# Altium PCB PCB_RX.PcbDoc (part 1 of 2)
Units mm, origin at the board's own origin, x right, y up, seen from the top; angles counter-clockwise.
Board outline 85 x 54.6 mm, 2 copper layers (Top Layer, Bottom Layer); 126 components, 66 nets, 378 pads, 157 vias.
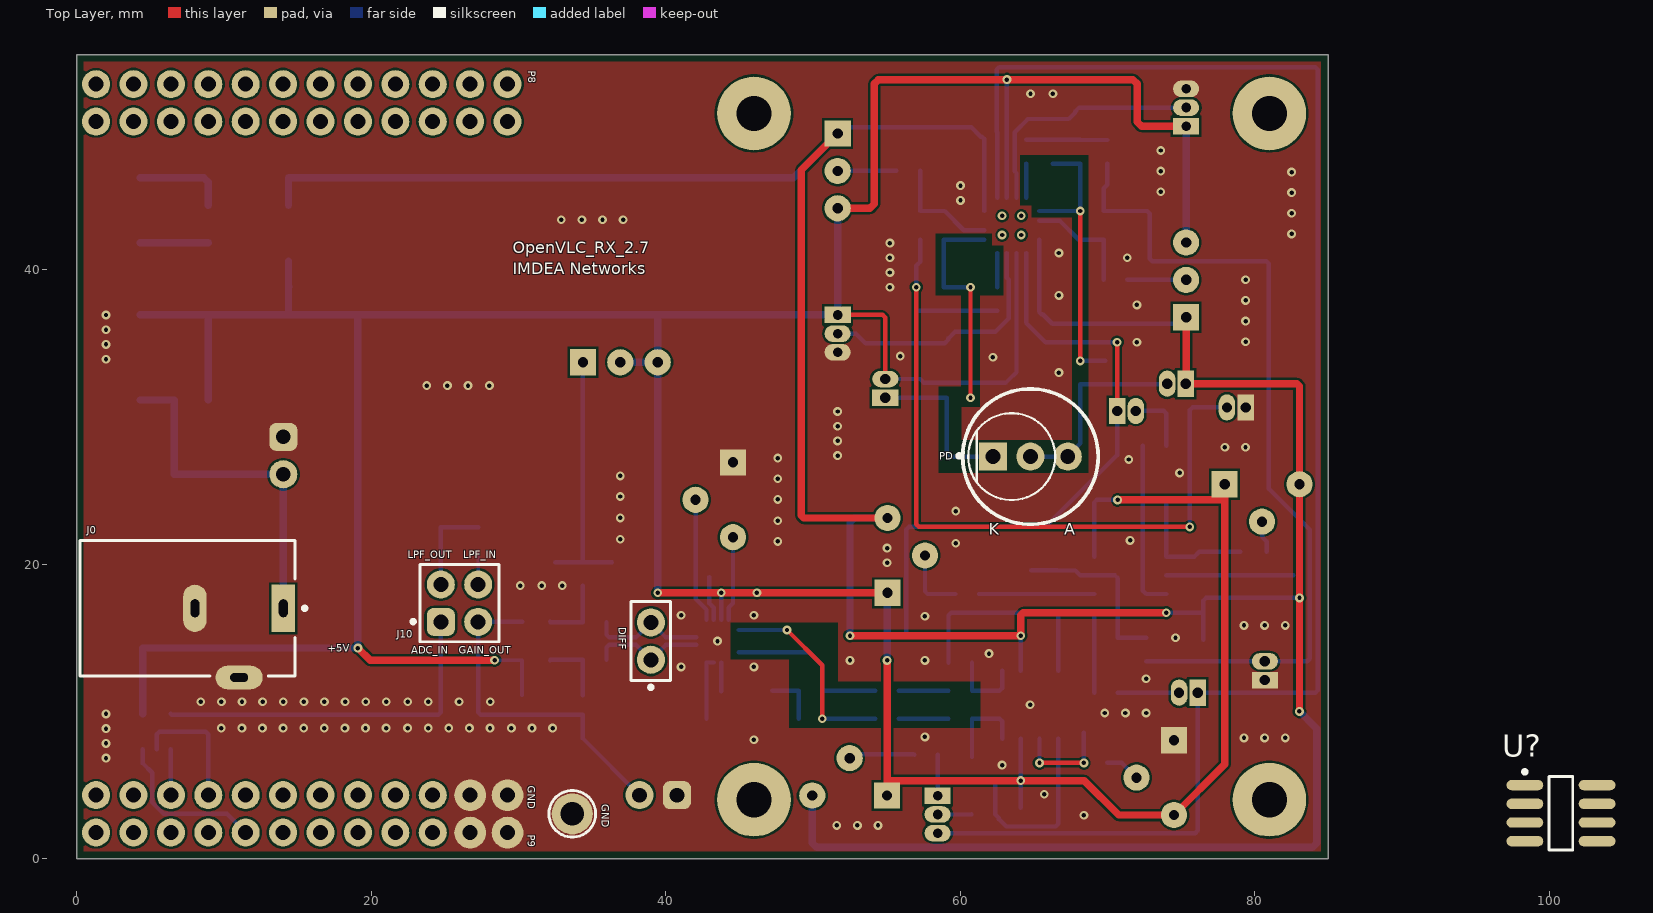
[diagram p0: Top Layer view]
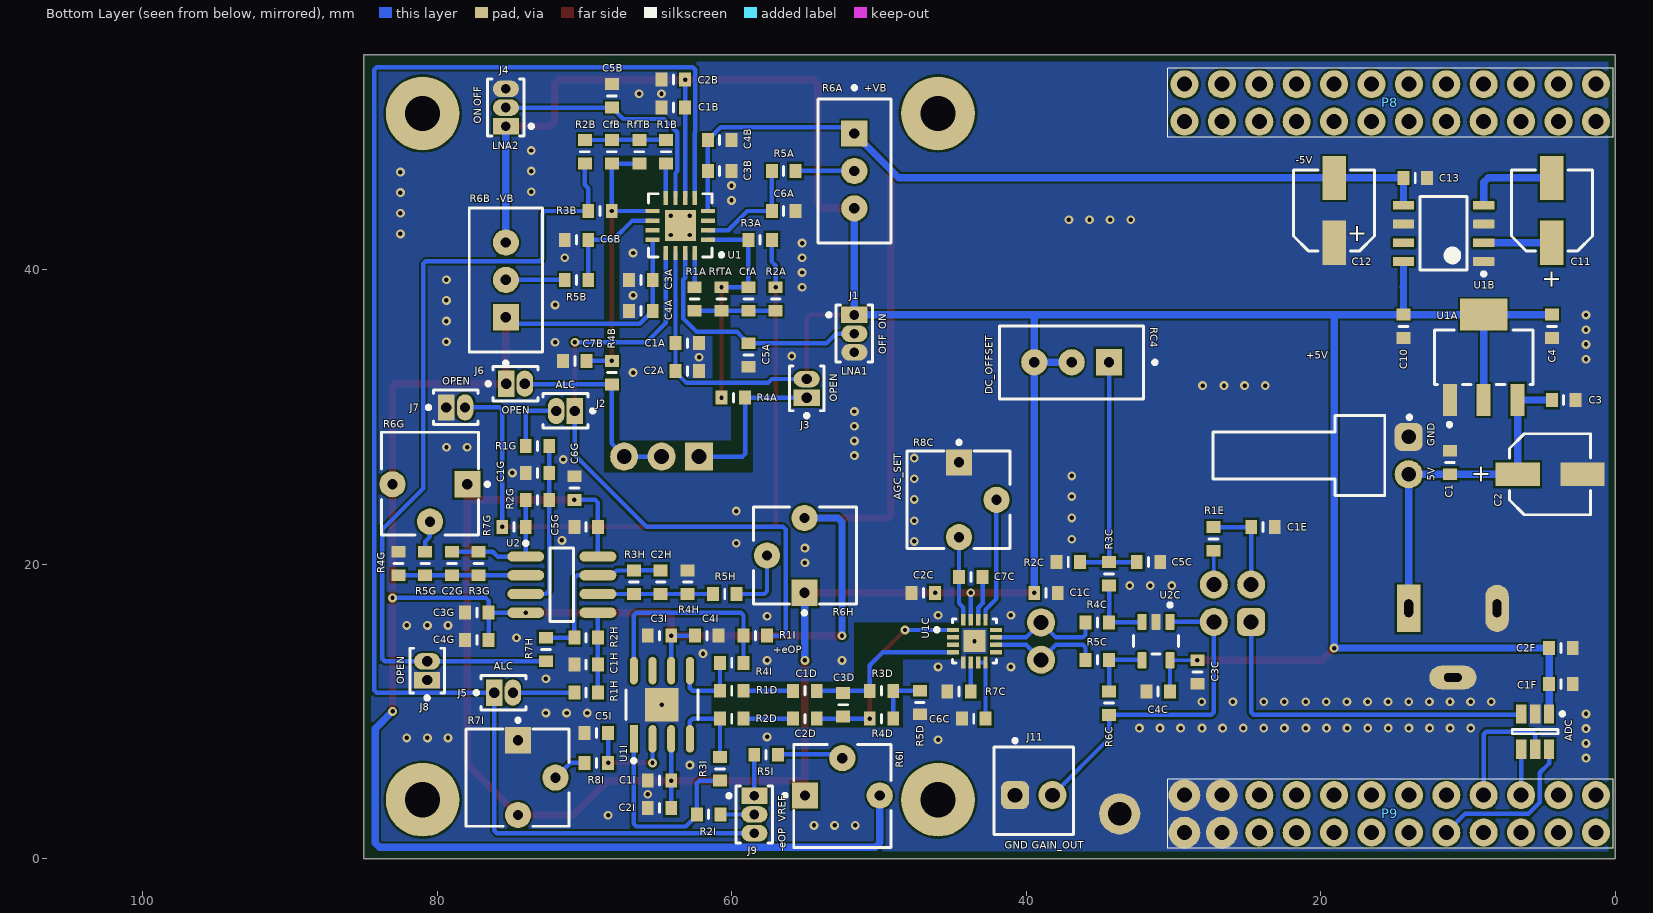
[diagram p1: Bottom Layer view, seen from below]
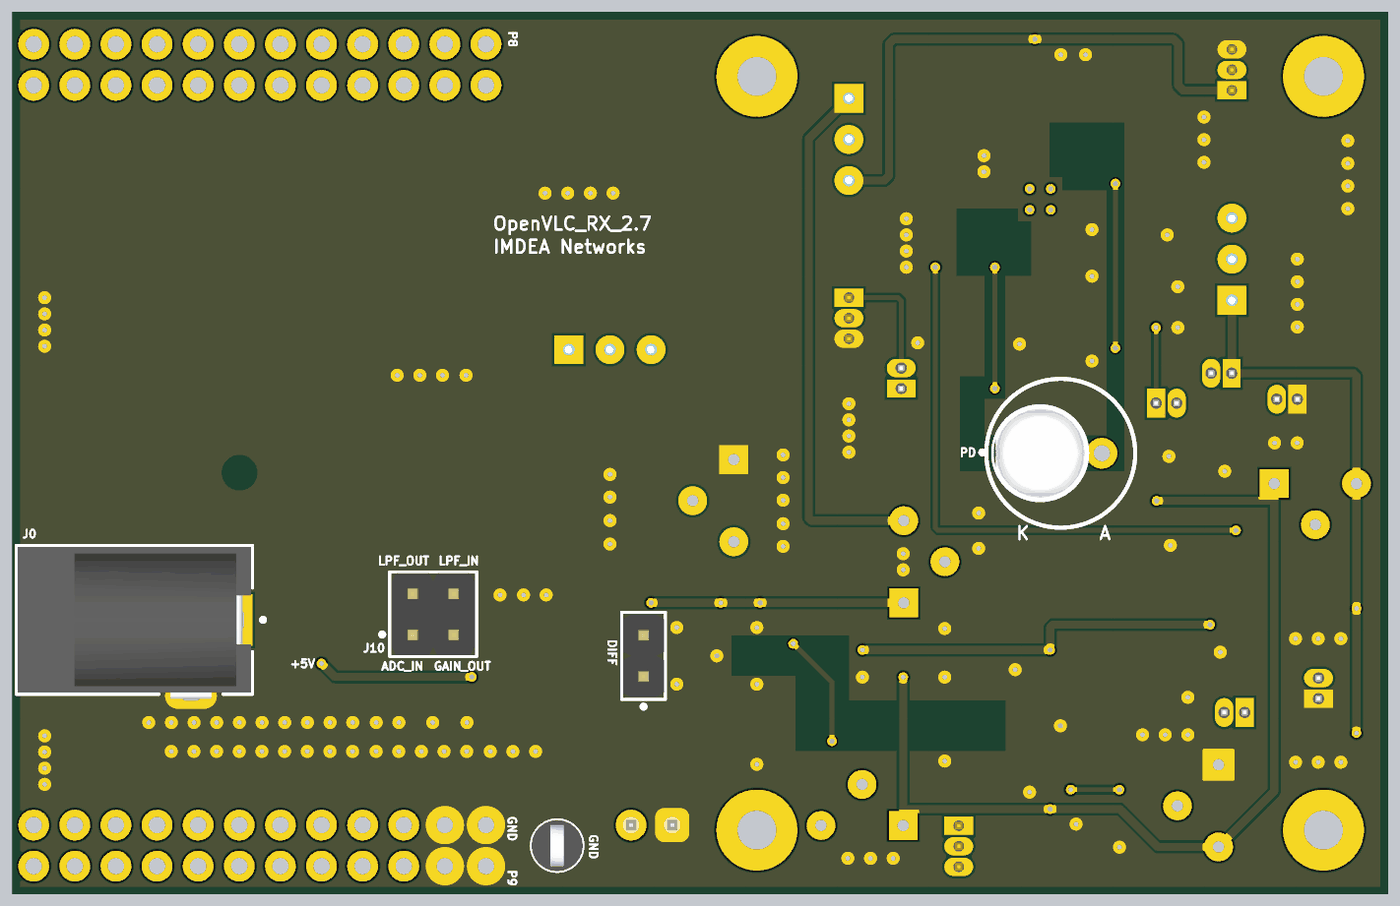
[diagram p2: 3D render of the assembled board from above, using the file's embedded part models]

## Layer stack, top to bottom
Top Solder: solder mask 0.0102, Solder Resist, Dk 3.5
Top Layer: signal copper 0.0356
Dielectric1: dielectric 0.32, FR-4, Dk 4.8
Bottom Layer: signal copper 0.0356
Bottom Solder: solder mask 0.0102, Solder Resist, Dk 3.5

## Board outline
0,0 85,0 85,54.6 0,54.6

## Design rules (kind name [scope] priority, off if disabled: settings)
Clearance Clearance_1 [(InNet('GND') AND InComponent('DC-DC'))] p1: gap=0.5 ignorepadtopadclearanceinfootprint=FALSE except(0: Arc-Hole Track-Hole SMDPad-Hole THPad-Hole Via-Hole Fill-Hole Poly-Hole Region-Hole Text-Hole)
Clearance [All] p2: gap=0.15 ignorepadtopadclearanceinfootprint=FALSE except(0: Arc-Hole Track-Hole SMDPad-Hole THPad-Hole Via-Hole Fill-Hole Poly-Hole Region-Hole Text-Hole)
DiffPairsRouting [All] p1: maxlimit=0.5 minlimit=0.2 mostfreqgap=0.2 toplayer_minwidth=0.127 toplayer_maxwidth=0.3 toplayer_prefwidth=0.127 bottomlayer_minwidth=0.127 bottomlayer_maxwidth=0.3 bottomlayer_prefwidth=0.127 impedanceprofiledriven=TRUE impedanceprofileid={C9FF6727-0311-42C7-A47E-204A0AB31086} impedanceprofilevalue=130.000000 maxuncoupledlength=12.7
HoleSize [All] p1: absolutevalues=TRUE maxlimit=2.54 minlimit=0.25 maxpercent=80.000 minpercent=20.000
MinimumSolderMaskSliver [All] p1: minsoldermaskwidth=0.15
PlaneConnect [All] p1: planeconnectstyle=Direct reliefexpansion=0.508 reliefentries=4 reliefconductorwidth=0.254 reliefairgap=0.254
PolygonConnect PolygonConnect_1 [IsVia & InNet('GND')] p1: connectstyle=Direct reliefconductorwidth=0.254 reliefentries=4 polygonreliefangle="90 Angle" airgapwidth=0
PolygonConnect [All] p2: connectstyle=Direct reliefconductorwidth=0.254 reliefentries=4 polygonreliefangle="90 Angle" airgapwidth=0.254
RoutingVias [All] p1: holewidth=0.711 width=1.27 viastyle="Through Hole" minholewidth=25 minwidth=0.55 maxholewidth=0.711 maxwidth=1.27
SMDNeckDown [All] p1: percent=80.000
SilkToSilkClearance [All] p1: silktosilkclearance=0.15
SilkToSolderMaskClearance [IsPad] p1: minsilkscreentomaskgap=0.15 clearancetoexposedcopper=TRUE
SolderMaskExpansion [All] p1: expansion=0.102 istentingtop=FALSE
SupplyNets "Schematic Supply Nets_5" [InNet('+5V')] p1: voltage=0.000
SupplyNets "Schematic Supply Nets_2" [InNet('-5V')] p2: voltage=0.000
SupplyNets "Schematic Supply Nets_1" [InNet('VCC')] p3: voltage=0.000
SupplyNets "Schematic Supply Nets" [InNet('GND')] p4: voltage=0.000
Width [All] p1: maxlimit=1 minlimit=0.15 preferedwidth=0.3 minimp=50.000000 maximp=50.000000 favimp=50.000000
24 further rules are at their usual default settings.

## Classes and differential pairs
differential pair LNA: +LNA_P -LNA_N
differential pair BPF: +BPF_P -BPF_N
differential pair AGC: +AGC_P -AGC_N

## Components (designator, comment, footprint, x,y, rotation, side; value= is the part's Value field where it differs from the comment)
5V "61900211021" 61900211021 -1248.51,-1242.629 r270 bottom
ADC "ADS7886SBDBVR" TI-DBV6_M 5.455,8.629 r270 bottom
C1 "Cap" RESC1608X55N 11.245,26.901 r90 bottom value=10uF
C1A "Cap" RESC1608X55N 63.025,35 r180 bottom value=100nF
C1B "Cap" RESC1608X55N 63.975,51 r0 bottom value=100nF
C1C "Cap" RESC1608X55N 38.663,18.05 r180 bottom value=100nF
C1D "Cap" RESC1608X55N 55.037,11.4 r180 bottom value=120nF
C1E "Cap" RESC1608X55N 23.933,22.511 r180 bottom value=620pF
C1F "Cap" RESC1608X55N 3.705,11.847 r180 bottom value=100nF
C1G "Cap" RESC1608X55N 73.201,26.19 r180 bottom value=100nF
C1H "Cap" RESC1608X55N 69.893,13.17 r180 bottom value=100nF
C1I "Cap" RESC1608X55N 64.915,5.3 r0 bottom value=100nF
C2 "47uF" WCAP-PSLP_D5H5.5 4.438,26.101 r0 bottom
C2A "Cap" RESC1608X55N 63.025,33.1 r180 bottom value=2.2uF
C2B "Cap" RESC1608X55N 63.975,52.9 r0 bottom value=2.2uF
C2C "Cap" RESC1608X55N 47,18.05 r0 bottom value=2.2uF
C2D "Cap" RESC1608X55N 55.037,9.5 r180 bottom value=120nF
C2F "Cap" RESC1608X55N 3.705,14.3 r180 bottom value=2.2uF
C2G "Cap" RESC1608X55N 79.011,20.042 r90 bottom value=100nF
C2H "Cap" RESC1608X55N 64.83,18.772 r90 bottom value=100nF
C2I "Cap" RESC1608X55N 64.915,3.45 r0 bottom value=2.2uF
C3 "Cap" RESC1608X55N 3.515,31.145 r0 bottom value=2.2uF
C3A "Cap" RESC1608X55N 66.175,39.3 r0 bottom value=100nF
C3B "Cap" RESC1608X55N 60.825,46.7 r180 bottom value=100nF
C3C "Cap" RESC1608X55N 28.384,12.674 r270 bottom value=100nF
C3D "Cap" RESC1608X55N 52.437,10.45 r90 bottom value=330pF
C3G "Cap" RESC1608X55N 77.317,16.702 r0 bottom value=100nF
C3I "Cap" RESC1608X55N 64.915,15.137 r180 bottom value=100nF
C4 "Cap" RESC1608X55N 4.315,36.145 r90 bottom value=10uF
C4A "Cap" RESC1608X55N 66.175,37.2 r0 bottom value=2.2uF
C4B "Cap" RESC1608X55N 60.825,48.8 r180 bottom value=2.2uF
C4C "Cap" RESC1608X55N 31.05,11.359 r0 bottom value=2.2uF
C4G "Cap" RESC1608X55N 77.317,14.856 r0 bottom value=2.2uF
C4I "Cap" RESC1608X55N 61.7,15.137 r0 bottom value=2.2uF
C5A "Cap" RESC1608X55N 58.877,34.2 r270 bottom value=100nF
C5B "Cap" RESC1608X55N 68.149,51.8 r90 bottom value=100nF
C5C "Cap" RESC1608X55N 31.708,20.138 r0 bottom value=2.2uF
C5G "Cap" RESC1608X55N 69.893,22.531 r0 bottom value=100nF
C5I "Cap" RESC1608X55N 69.2,8.541 r0 bottom value=100nF
C6A "Cap" RESC1608X55N 56.477,43.975 r180 bottom value=100nF
C6B "Cap" RESC1608X55N 70.549,42.024 r0 bottom value=100nF
C6C "Cap" RESC1608X55N 43.573,9.5 r180 bottom value=2.2uF
C6G "Cap" RESC1608X55N 70.693,25.161 r90 bottom value=2.2uF
C7B "Cap" RESC1608X55N 70.66,33.8 r0 bottom value=100nF
C7C "Cap" RESC1608X55N 43.773,19.124 r0 bottom value=2.2uF
C10 "Cap" RESC1608X55N 14.395,36.145 r90 bottom value=2.2uF
C11 "47uF" WCAP-PSLP_D5H5.5 4.315,44.023 r270 bottom
C12 "47uF" WCAP-PSLP_D5H5.5 19.105,44.023 r270 bottom
C13 "Cap" RESC1608X55N 13.595,46.223 r0 bottom value=10uF
CfA "Cap" RESC1608X55N 58.877,38 r270 bottom value=0.3pF
CfB "Cap" RESC1608X55N 68.149,48 r90 bottom value=0.3pF
DIFF "61300211121" 61300211121 39,14.774 r90 top
GND "5011" KSTN-5011_V 33.662,3.041 r270 top
J0 "PJ-102A" FP-PJ-102A-MFG 7.54,17 r90 top
J1 "GRPB031VWVN-RC" FP-TMS-103-02-G-S-MFG 51.682,35.651 r270 bottom
J2 "GRPB021VWVN-RC" FP-GRPB021VWVN-RC-MFG 71.295,30.4 r0 bottom
J3 "GRPB021VWVN-RC" FP-GRPB021VWVN-RC-MFG 54.915,31.933 r90 bottom
J4 "GRPB031VWVN-RC" FP-TMS-103-02-G-S-MFG 75.344,51 r90 bottom
J5 "GRPB021VWVN-RC" FP-GRPB021VWVN-RC-MFG 75.5,11.27 r180 bottom
J6 "GRPB021VWVN-RC" FP-GRPB021VWVN-RC-MFG 74.693,32.249 r180 bottom
J7 "GRPB021VWVN-RC" FP-GRPB021VWVN-RC-MFG 78.75,30.64 r180 bottom
J8 "GRPB021VWVN-RC" FP-GRPB021VWVN-RC-MFG 80.692,12.765 r90 bottom
J9 "GRPB031VWVN-RC" FP-TMS-103-02-G-S-MFG 58.469,3 r270 bottom
J10 "61300421121" 61300421121 26.003,17.344 r0 top
J11 "61900211121" 61900211121 39.5,4.611 r0 bottom
P8 "61302421121" BBB_CAPE_NO_HEADER_R_24#1 57.205,50.049 r0 bottom
P9 "61302421121" BBB_CAPE_NO_HEADER_R_24#2 57.205,1.771 r0 bottom
PD "SFH213" FP-SFH213-0 63.5,27.3 r0 top
R1A "Res1" RESC1608X55N 62.525,38 r90 bottom value=100
R1B "Res1" RESC1608X55N 64.475,48 r270 bottom value=100
R1D "Res1" RESC1608X55N 60.005,11.4 r0 bottom value=130
R1E "Res1" RESC1608X55N 27.294,21.711 r270 bottom value=130
R1G "Res1" RESC1608X55N 73.201,28.028 r180 bottom value=10k
R1H "Res1" RESC1608X55N 69.893,11.27 r180 bottom value=10k
R1I "Res1" RESC1608X55N 58.405,15.137 r180 bottom value=510
R2A "Res1" RESC1608X55N 57.021,38 r90 bottom value=100
R2B "Res1" RESC1608X55N 69.984,48 r270 bottom value=100
R2C "Res1" RESC1608X55N 37.156,20.138 r0 bottom value=130
R2D "Res1" RESC1608X55N 60.005,9.5 r0 bottom value=130
R2G "Res1" RESC1608X55N 73.201,24.361 r180 bottom value=10k
R2H "Res1" RESC1608X55N 69.893,15 r180 bottom value=10k
R2I "Res1" RESC1608X55N 61.57,3.012 r180 bottom value=510
R3A "Res1" RESC1608X55N 58.077,42.024 r180 bottom value=100
R3B "Res1" RESC1608X55N 68.949,43.975 r0 bottom value=100
R3C "Res1" RESC1608X55N 34.383,19.338 r90 bottom value=130
R3D "500" RESC1608X55N 49.837,11.4 r180 bottom value=130
R3G "Res1" RESC1608X55N 77.194,20.042 r90 bottom value=10k
R3H "Res1" RESC1608X55N 66.655,18.772 r90 bottom value=10k
R3I "Res1" RESC1608X55N 60.803,6.1 r270 bottom value=1k
R4A "Res1" RESC1608X55N 59.9,31.3 r0 bottom value=0
R4B "Res1" RESC1608X55N 68.149,33 r270 bottom value=0
R4C "Res1" RESC1608X55N 35.183,16.044 r0 bottom value=130
R4D "Res1" RESC1608X55N 49.837,9.5 r0 bottom value=130
R4G "Res1" RESC1608X55N 82.637,20.042 r270 bottom value=10k
R4H "Res1" RESC1608X55N 62.996,18.772 r270 bottom value=10k
R4I "Res1" RESC1608X55N 60.005,13.3 r180 bottom value=1k
R5A "Res1" RESC1608X55N 56.477,46.7 r0 bottom value=100
R5B "Res1" RESC1608X55N 70.549,39.3 r180 bottom value=100
R5C "Res1" RESC1608X55N 35.183,13.504 r0 bottom value=130
R5D "Res1" RESC1608X55N 47.237,10.6 r90 bottom value=1M
R5G "Res1" RESC1608X55N 80.82,20.042 r90 bottom value=100
R5H "Res1" RESC1608X55N 60.481,17.972 r180 bottom value=100
R5I "Res1" RESC1608X55N 57.674,7.054 r180 bottom value=100
R6A "50k" FP-3296W-MFG 51.677,46.7 r90 bottom value=500kΩ
R6B "50k" FP-3296W-MFG 75.349,39.3 r270 bottom value=500kΩ
R6C "Res1" RESC1608X55N 34.383,10.559 r90 bottom value=130
R6G "50k" BOUR-3362P#1 80.5,25.458 r0 bottom
R6H "50k" BOUR-3362P#1 55.037,20.59 r90 bottom
R6I "50k" BOUR-3362P#1 52.497,4.25 r180 bottom
R7C "Res1" RESC1608X55N 44.573,11.359 r180 bottom value=10k
R7G "Res1" RESC1608X55N 74.793,22.531 r180 bottom value=0
R7H "Res1" RESC1608X55N 72.623,14.2 r90 bottom value=0
R7I "50k" BOUR-3362P#1 74.554,5.5 r270 bottom
R8C "10k" BOUR-3362P#2 44.609,24.367 r270 bottom
R8I "Res1" RESC1608X55N 69.2,6.5 r0 bottom value=100
RC4 "500" FP-3296W-MFG 36.923,33.7 r180 bottom value=500kΩ
RfTA "Res1" RESC1608X55N 60.7,38 r270 bottom value=20k
RfTB "Res1" RESC1608X55N 66.282,48 r90 bottom value=20k
U1 "ADA4817-2ACPZ-RL" CP-16-4_N 63.5,43 r0 bottom
U1A "TLV76150DCYR" FP-DCY0004A-MFG 8.945,34.045 r90 bottom
U1B "LM2663M/NOPB" D0008A_N 11.67,42.458 r0 bottom
U1C "AD8338ACPZ-R7" FP-CP-16-22-IPC_A 43.523,14.774 r180 bottom
U1I "AD8139ARDZ-REEL" FP-RD-8-1-IPC_C 64.75,10.45 r90 bottom
U2 "AD8066ARZ-R7" ADI-R-8_M 71.543,18.607 r180 bottom
U2C "OPA863ADBVR" FP-DBV0005A-MFG 31.2,14.774 r270 bottom
U? "AD8066ARZ-R7" ADI-R-8_M 100.796,3.089 r0 top

## Footprints (in the part's own frame and the unit in brackets; to place one, negate y for a bottom-side part, rotate by r counter-clockwise, add the part's x,y. Pads: shape width x height; smd on the part's side, far side on the other; paste and mask are expansions set on the pad)
61300211121 [mil] "Pin Header, pitch 2.54 mm, THT, Vertical, single row, 2p"
  round 75 hole 40: 1(-50,0) 2(50,0)
  silkscreen extent -129,-53 106,53, body extent -100,-50 100,50, height 337
61300421121 [mil] "Pin Header, pitch 2.54 mm, THT, Vertical, dual row, 4p"
  rrect50% 75x75 hole 40: 1(-50,-50)
  round 75 hole 40: 2(-50,50) 3(50,-50) 4(50,50)
  silkscreen extent -129,-103 106,103, body extent -100,-100 100,100, height 338
61900211021 [mm] "2.54mm Male Left Angled Header Bottom Locking, 2p"
  rrect50% 1.905x1.905 hole 1: 1(-1271.27,-1262.55)
  round 1.905 hole 1: 2(-1268.73,-1262.55)
  silkscreen extent -1272.72,-1275.82 -1267.29,-1262.38, body extent -1272.54,-1275.75 -1267.46,-1262.23, height 5.83
61900211121 [mm] "2.54mm Male Locking Header, 2p"
  rrect50% 1.905x1.905 hole 1: 1(1.27,0.3)
  round 1.905 hole 1: 2(-1.27,0.3)
  silkscreen extent -2.71,-3.52 2.71,2.98, body extent -2.54,-2.9 2.54,2.9, height 11.53
ADI-R-8_M [mm] "SOIC, 8-Leads, Body 4.9x3.9mm, Pitch 1.27mm, IPC Low Density"
  oval 2.5x0.7 smd: 1(-2.45,1.905) 2(-2.45,0.635) 3(-2.45,-0.635) 4(-2.45,-1.905) 5(2.45,-1.905) 6(2.45,-0.635) 7(2.45,0.635) 8(2.45,1.905)
  silkscreen extent -2.58,-2.5 0.8,2.93, body extent -2,-2.5 2,2.5, height 1.75
BBB_CAPE_NO_HEADER_R_24#1 [mil] "46-pin male header for BeagleBone Black P8,P9"
  round 75 hole 40: 23(-1100,0) 24(-1100,-100) 25(-1200,0) 26(-1200,-100) 27(-1300,0) 28(-1300,-100) 29(-1400,0) 30(-1400,-100) 31(-1500,0) 32(-1500,-100) 33(-1600,0) 34(-1600,-100) 35(-1700,0) 36(-1700,-100) 37(-1800,0) 38(-1800,-100) 39(-1900,0) 40(-1900,-100) 41(-2000,0) 42(-2000,-100) 43(-2100,0) 44(-2100,-100) 45(-2200,0) 46(-2200,-100)
  silkscreen extent -2246,-142 -1056,42
BBB_CAPE_NO_HEADER_R_24#2 [mil] "46-pin male header for BeagleBone Black P8,P9"
  round 85 hole 40: 23(-1100,0) 24(-1100,-100) 25(-1200,0) 26(-1200,-100)
  round 75 hole 40: 27(-1300,0) 28(-1300,-100) 29(-1400,0) 30(-1400,-100) 31(-1500,0) 32(-1500,-100) 33(-1600,0) 34(-1600,-100) 35(-1700,0) 36(-1700,-100) 37(-1800,0) 38(-1800,-100) 39(-1900,0) 40(-1900,-100) 41(-2000,0) 42(-2000,-100) 43(-2100,0) 44(-2100,-100) 45(-2200,0) 46(-2200,-100)
  silkscreen extent -2246,-142 -1056,42
BOUR-3362P#1 [mm] "THD, 3-Leads, Body 6.6x6.99mm, Pitch 2.54mm"
  rect 1.778x1.778 hole 0.7: 1(-2.54,0.035)
  round 1.778 hole 0.7: 2(0,2.575) 3(2.54,0.035)
  silkscreen extent -4.02,-3.49 3.3,3.5, body extent -3.3,-3.49 3.3,3.49, height 4.95
BOUR-3362P#2 [mm] "THD, 3-Leads, Body 6.6x6.99mm, Pitch 2.54mm"
  rect 1.778x1.778 hole 0.7 paste-2539.97 mask+0: 1(-2.54,0.035)
  round 1.778 hole 0.7 paste-2539.97 mask+0: 2(0,2.575) 3(2.54,0.035)
  silkscreen extent -4.02,-3.49 3.3,3.5, body extent -3.3,-3.49 3.3,3.49, height 4.95
CP-16-4_N [mm] "QFN, 16-Leads, Body 4x4mm, Pitch 0.65mm, Thermal Pad 2.1x2.1mm, IPC Medium Density"
  rect 0.95x0.3 smd: 1(-1.875,0.975) 2(-1.875,0.325) 3(-1.875,-0.325) 4(-1.875,-0.975) 9(1.875,-0.975) 10(1.875,-0.325) 11(1.875,0.325) 12(1.875,0.975)
  rect 0.3x0.95 smd: 5(-0.975,-1.875) 6(-0.325,-1.875) 7(0.325,-1.875) 8(0.975,-1.875) 13(0.975,1.875) 14(0.325,1.875) 15(-0.325,1.875) 16(-0.975,1.875)
  rect 2.1x2.1 smd: 17(0,0)
  silkscreen extent -2.92,-2.15 2.15,2.15, body extent -2,-2 2,2, height 1
D0008A_N [mm] "SOIC, 8-Leads, Body 5x4mm, Pitch 1.27mm, IPC Medium Density"
  rrect17% 1.45x0.6 smd: 1(-2.725,1.905) 2(-2.725,0.635) 3(-2.725,-0.635) 4(-2.725,-1.905) 5(2.725,-1.905) 6(2.725,-0.635) 7(2.725,0.635) 8(2.725,1.905)
  silkscreen extent -2.85,-2.5 1.6,2.88, body extent -3,-2.45 3,2.45, height 1.63
FP-3296W-MFG [mm]
  rect 1.778x1.778 hole 0.7 paste-2539.97 mask+0: 1(2.54,0.005)
  round 1.778 hole 0.7 paste-2539.97 mask+0: 2(0,0.005) 3(-2.54,0.005)
  silkscreen extent -4.89,-2.48 5.77,2.48, body extent -4.74,-2.41 4.79,2.42, height 12.03
FP-CP-16-22-IPC_A [mm]
  rect 0.8x0.3 smd paste+0 mask+0.102: 1(-1.453,0.75) 2(-1.453,0.25) 3(-1.453,-0.25) 4(-1.453,-0.75) 9(1.453,-0.75) 10(1.453,-0.25) 11(1.453,0.25) 12(1.453,0.75)
  rect 0.3x0.8 smd paste+0 mask+0.102: 5(-0.75,-1.453) 6(-0.25,-1.453) 7(0.25,-1.453) 8(0.75,-1.453) 13(0.75,1.453) 14(0.25,1.453) 15(-0.25,1.453) 16(-0.75,1.453)
  rect 1.5x1.5 smd paste+0 mask+0.102: 17(0,0)
  silkscreen extent -2.68,-1.5 1.5,1.5, body extent -1.5,-1.5 1.5,1.5, height 0.8
FP-DBV0005A-MFG [mm]
  rrect17% 1.1x0.6 smd paste+0 mask+0: 1(-1.3,0.95) 2(-1.3,0) 3(-1.3,-0.95) 4(1.3,-0.95) 5(1.3,0.95)
  silkscreen extent -2.57,-1.53 0.87,1.53, body extent -1.4,-1.45 1.4,1.45, height 1.45
FP-DCY0004A-MFG [mm]
  rect 2.15x0.95 smd paste+0 mask+0: 1(-2.9,2.3) 2(-2.9,0) 3(-2.9,-2.3)
  rect 2.15x3.25 smd paste+0 mask+0: 4(2.9,0)
  silkscreen extent -4.7,-3.35 1.85,3.35, body extent -3.5,-3.25 3.5,3.25, height 1.8
FP-GRPB021VWVN-RC-MFG [mm]
  rect 1.12x1.778 hole 0.7 paste-2539.97 mask+0: 1(-0.635,0)
  oval 1.12x1.778 hole 0.7 paste-2539.97 mask+0: 2(0.635,0)
  silkscreen extent -1.97,-1.17 1.52,1.17, body extent -1.28,-1.07 1.26,1.07, height 4.4
FP-PJ-102A-MFG [mm]
  rect 3.2x1.6 hole 0.6 slot 1.2 at 0 deg paste-2539.97 mask+0: 1(0,-6.5)
  rrect100% 3.2x1.6 hole 0.6 slot 1.2 at 0 deg paste-2539.97 mask+0: 2(0,-0.5)
  oval 1.6x3.2 hole 0.6 slot 1.2 at 90 deg paste-2539.97 mask+0: 3(-4.7,-3.5)
  silkscreen extent -4.6,-8.08 4.6,7.3, body extent -5.6,-7.4 4.7,7.4, height 0.25
FP-RD-8-1-IPC_C [mm]
  rect 1.874x0.542 smd paste+0 mask+0: 1(-2.316,1.905)
  rrect100% 1.874x0.542 smd paste+0 mask+0: 2(-2.316,0.635) 3(-2.316,-0.635) 4(-2.316,-1.905) 5(2.316,-1.905) 6(2.316,-0.635) 7(2.316,0.635) 8(2.316,1.905)
  rect 2.29x2.29 smd paste-1000 mask+0: 9(0,0)
  silkscreen extent -3.93,-2.45 1,2.45
FP-SFH213-0 [mm]
  rect 1.905x1.905 hole 1 paste-2539.97 mask+0: 1(-1.27,0)
  round 1.905 hole 1 paste-2539.97 mask+0: 2(1.27,0)
  silkscreen extent -3.7,-2.95 2.95,2.95, body extent -3.05,-3.05 3.05,3.05, height 0.25
FP-TMS-103-02-G-S-MFG [mm]
  rect 1.12x1.778 hole 0.66 paste-2539.97 mask+0: 1(-1.27,0)
  oval 1.12x1.778 hole 0.66 paste-2539.97 mask+0: 2(0,0) 3(1.27,0)
  silkscreen extent -1.93,-1.85 1.93,1.24, body extent -1.91,-1.22 1.91,1.22, height 5.33
KSTN-5011_V [mil] "Test Point, Dia 3.17mm"
  round 110 hole 62.99: 1(0,0)
  silkscreen extent -62,-62 62,62, body extent -62,-62 63,63, height 320
RESC1608X55N [mm]
  rect 0.8x0.95 smd: 1(-0.8,0) 2(0.8,0)
  silkscreen extent 0,-0.3 0,0.3
TI-DBV6_M [mm] "SOT23, 6-Leads, Body 2.9x1.6mm, Pitch 0.95mm, IPC Low Density"
  rect 1.3x0.7 smd: 1(-1.2,0.95) 2(-1.2,0) 3(-1.2,-0.95) 4(1.2,-0.95) 5(1.2,0) 6(1.2,0.95)
  silkscreen extent -1.32,-1.55 0.15,1.97, body extent -0.87,-1.52 0.87,1.53, height 1.45
WCAP-PSLP_D5H5.5 [mm] "Aluminum Polymer Capacitors, body diameter 5mm"
  rect 3x1.6 smd: 1(2.2,0) 2(-2.2,0)
  silkscreen extent -2.75,-2.75 2.75,2.75, body extent -3,-2.65 3,2.65, height 5.5

## Part data
5V: library part CMP-1502-00592-2, Color=Beige, Contact Resistance=20mΩ, Current Rating=3A, Flammability Rating="UL94 V-0", Insulation Resistance=1GΩ, Max Operating Temperature=105°C, Min Operating Temperature=-40°C, Operating Supply Voltage=250V, Connector Type="Male Pin", Contact Gender=Male, Contact Material=Copper, Contact Mating Length=7.62mm, Contact Plating=Tin, Fastening Type=Friction, Gender=Male, Height=3.2mm, Housing Material=Nylon, Insulation=Insulated, Lead Pitch=2.54mm, Length=5.08mm, Mount="Through Hole", NexarPartId=18818217, Number of Contacts=2, Number of Pins=2, Number of Positions=2, Number of Rows=1, Packaging=Bulk, Pitch=2.54mm, REACH SVHC=Unknown, RoHS=Compliant, Termination="Through Hole", Voltage Rating=250V, Width=5.12mm
ADC: library part CMP-0003-00246-2, "2.35 to 5.25 V, 12-Bit, 1 MSPS, Serial ADC, -40 to 125 degC, 6-pin SOT23 (DBV6), Green (RoHS & no Sb/Br)", Analog Voltage AV/DD(Max)(V)=5.25, Analog Voltage AV/DD(Min)(V)=2.35, Manufacturer="Texas Instruments", # Input Channels=1, Architecture=SAR, Code_JEDEC=MO-178, ComponentLink1Description="Manufacturer URL", ComponentLink1URL=http://www.ti.com/, ComponentLink2Description=Datasheet, ComponentLink2URL=http://www.ti.com/general/docs/lit/getliterature.tsp?genericPartNumber=ADS7886&fileType=pdf, ComponentLink3Description="Package Specification", ComponentLink3URL=http://www.ti.com/litv/pdf/mpds026h, DatasheetVersion=SLAS492A, Digital Supply(Max)(V)=5.25, Digital Supply(Min)(V)=2.35, Eco-Plan="Green (RoHS & no Sb/Br)", INL(Max)(+/-LSB)=1.25, Interface="Serial SPI", Mounting Technology="Surface Mount", PackageDescription="6-Pin Plastic Small Outline, Body 1.6 x 2.9 mm, Pitch 0.95 mm", PackageReference=DBV6, PackageVersion="4073253-5/K, 03/2006", PartNumber=ADS7886SBDBVR, Resolution(Bits)=12, Sample Rate (max)(SPS)=1M, SFDR(dB)=85.5, SINAD(dB)=71.25, SNR(dB)=71.25, SubFamily="Precision ADC (<=10MSPS)"
C1 C1A C1B C1C C1D C1E C1F C1G C1H C1I C2A C2B C2C C2D C2F C2G C2H C2I C3 C3A C3B C3C C3D C3G C3I C4 C4A C4B C4C C4G C4I C5A C5B C5C C5G C5I C6A C6B C6C C6G C7B C7C C10 C13 CfA CfB: "Capacitor", LatestRevisionDate=17-Jul-2002, LatestRevisionNote="Re-released for DXP Platform.", PackageDescription="Radial Cap, Thru-Hole; 2 Leads; 0.3 in Pin Spacing", PackageReference=RAD-0.3, Published=8-Jun-2000, Publisher="Altium Limited"
C2 C11 C12: library part CMP-03913-53758736-1, "875105242006 WCAP-PSLP Aluminum Polymer Capacitors", Capacitance=47µF, Case/Package=Radial, ESR (Equivalent Series Resistance)=30mΩ, Leakage Current=300µA, Max Operating Temperature=105°C, Min Operating Temperature=-55°C, Ripple Current=1.97A, Tolerance=20%, Voltage Rating=10V, Diameter=5mm, Height - Seated (Max)=5.5118mm, Length=5.5mm, Life (Hours)=2000hours, Mount="Surface Mount", NexarPartId=53758736, Packaging="Tape & Reel (TR)", Pitch=5.3mm, Polarity=Polar, REACH SVHC=Unknown, RoHS=Compliant, Voltage Rating (DC)=10V
DIFF: library part CMP-1712-00002-6, Color=Black, Contact Resistance=20mΩ, Current Rating=3A, Max Operating Temperature=125°C, Min Operating Temperature=-40°C, Operating Supply Voltage=250V, Connector Type="Male Pin", Contact Gender=Male, Contact Material=Copper, Contact Mating Length=5.9944mm, Contact Plating=Gold, Gender=Male, Height=8.94mm, Housing Material=PBT, Lead Free="Lead Free", Lead Pitch=2.54mm, Mount="Through Hole", NexarPartId=20081794, Number of Contacts=2, Number of Pins=2, Number of Positions=2, Number of Rows=1, Orientation=Vertical, Packaging=Bulk, Pitch=2.54mm, REACH SVHC="No SVHC", RoHS=Compliant, Termination="Through Hole", Voltage Rating=250V
GND: library part CMP-1672-00003-4, "Test Point, Black, Through Hole, RoHS, Bulk", Colour=Black, Manufacturer=Keystone, Package Quantity=100, ComponentLink1Description="Manufacturer URL", ComponentLink1URL=http://www.keyelco.com/, ComponentLink2Description=Datasheet, ComponentLink2URL=http://www.keyelco.com/product-pdf.cfm?p=1320, Contact Material=Bronze, Contact Plating=Silver, DatasheetVersion="Rev. F, 12/2013", Height="8.12 mm", Mount="Through Hole", Mounting Technology="Through Hole", PackageDescription="1-Pin Through Hole Device, Dia 3.17 mm", PackageReference=5011, Packaging=Bulk, Pins=1, REACH SVHC="No SVHC", RoHSCompliant=true
J0: library part CMP-12637-106234071-1, "PJ-102A 2.0 x 6.5 mm, 2.5 A, Horizontal, Through Hole, Tapered Pins, Dc Power Jack Connector", Color=Black, Current Rating=2.5A, Flammability Rating="UL94 V-0", Insulation Resistance=50MΩ, Max Operating Temperature=85°C, Min Operating Temperature=-25°C, Voltage Rating=24V, Contact Gender=Male, Contact Material="Copper, Nickel, Tin", Contact Plating=Nickel, Diameter=2.1mm, Gender=Male, Height=11.2mm, Housing Color=Black, Housing Material=Thermoplastic, Inside Diameter=2mm, Lead Free="Lead Free", Lifecycle Status=Production, Mount="Through Hole", NexarPartId=106234071, Number of Conductors=2, Number of Contacts=3, Orientation=Horizontal, Outside Diameter=6.5mm, Packaging=Bulk, RoHS=Compliant, Schedule B="8536695050, 8536695050", Shielding=No, Termination="Through Hole", Voltage Rating (DC)=24V
J1 J4 J9: library part CMP-02766-001782-1, "CONN HEADER VERT 3POS 1.27MM", Flammability Rating="UL94 V-0", Housing Color=Black, Max Current Rating=1A, Max Operating Temperature=125°C, Min Operating Temperature=-55°C, Connector Type=Header, Contact Finish - Mating=GOLD, Contact Material=Bronze, Contact Plating=Gold, Contact Shape=Square, Contact Type="Male Pin", Depth=2.48mm, Fastening Type=Pull, Gender=Male, Housing Material=Polymer, Insulation Color=Black, Insulation Material=Polymer, Length=3.81mm, Number of Contacts=3, Number of Positions=3, Number of Rows=1, Orientation=Straight, Packaging=Bulk, Pitch=1.27mm, Radiation Hardening=No, Reach SVHC Compliant=Yes, RoHS Compliant=Yes, Series=TMS, Termination=Solder
J2 J3 J5 J6 J7 J8: library part CMP-2000-06371-2, "CONN HEADER VERT 2POS 1.27MM", Package Quantity=1, Connector Type="Male Pin", Contact Mating Length=0.118inch, Contact Plating=Gold, Contact Type="Male Pin", Lead Free="Lead Free", Mount="Through Hole", Number of Positions=2, Number of Rows=1, Packaging=Bulk, Pitch=0.05inch, RoHS Compliant=Yes, Termination=Solder
J10: library part CMP-1502-01066-4, Color=Black, Contact Resistance=20mΩ, Current Rating=3A, Max Operating Temperature=105°C, Min Operating Temperature=-40°C, Operating Supply Voltage=250V, Connector Type="Male Pin", Contact Material=Copper, Contact Mating Length=5.9944mm, Contact Plating=Gold, Gender=Male, Height=8.89mm, Lead Free="Lead Free", Lead Pitch=2.54mm, Mount="Through Hole", NexarPartId=32855524, Number of Contacts=4, Number of Pins=4, Number of Positions=4, Number of Rows=2, Orientation=Vertical, Packaging=Bulk, Pitch=2.54mm, REACH SVHC=Unknown, RoHS=Compliant, Row Spacing=2.54mm, Termination=Solder, Voltage Rating=250V
J11: library part CMP-1502-00584-3, Color=Beige, Contact Resistance=20mΩ, Current Rating=3A, Flammability Rating="UL94 V-0", Insulation Resistance=1GΩ, Max Operating Temperature=105°C, Min Operating Temperature=-40°C, Operating Supply Voltage=250V, Connector Type="Male Pin", Contact Gender=Male, Contact Material=Copper, Contact Mating Length=7.493mm, Contact Plating=Tin, Fastening Type=Friction, Gender=Male, Height=11.75mm, Housing Material=Nylon, Lead Pitch=2.54mm, Length=5.08mm, Mount="Through Hole", NexarPartId=18818218, Number of Contacts=2, Number of Pins=2, Number of Positions=2, Number of Rows=1, Orientation=Vertical, Packaging=Bulk, Pitch=2.54mm, REACH SVHC=Unknown, RoHS=Compliant, Termination="Through Hole", Voltage Rating=250V, Width=5.12mm
P8: library part BBB_P8_reduced
P9: library part BBB_P9_reduced
PD: library part CMP-62027-000002-1, "SENSOR PHOTODIODE 850NM RADIAL", Dark Current=0.001uA, Forward Current=100mA, Forward Voltage=1.3V, Manufacturer=OSRAM, Power Dissipation=150mW, Reverse Breakdown Voltage=20V, Temperature="-40°C to +100°C", Temperature Range High=+100°C, Temperature Range Low=-40°C, Voltage=50V, Automotive=No, Category=Diode, ComponentLink2Description=Datasheet, ComponentLink2URL=https://dammedia.osram.info/media/resource/hires/osram-dam-5488355/SFH%20213_EN.pdf, Device Class L1=Sensors, Device Class L2="Optical Sensors", Device Class L3=Photodiodes, Digikey Description="SENSOR PHOTODIODE 850NM RADIAL", Ipc Land Pattern Name=CAPRD254W95D570H860, Lead Free=Yes, Manufacturer Part Number=SFH213, Mouser Description="Photodiode PIN Chip 850nm 0.62A/W Sensitivity 2-Pin T-1 3/4 T/R", Octopart=https://octopart.com/sfh+213-osram+opto-55410864, Package=SFH213, RoHS=TRUE, Sensor Output=Photodiode, Wavelength=400-1100nm
R1A R1B R1D R1E R1G R1H R1I R2A R2B R2C R2D R2G R2H R2I R3A R3B R3C R3G R3H R3I R4A R4B R4C R4D R4G R4H R4I R5A R5B R5C R5D R5G R5H R5I R6C R7C R7G R7H R8I RfTA RfTB: "Resistor", LatestRevisionDate=17-Jul-2002, LatestRevisionNote="Re-released for DXP Platform.", PackageDescription="Axial Device, Thru-Hole; 2 Leads; 0.3 in Pin Spacing", PackageReference=AXIAL-0.3, Published=8-Jun-2000, Publisher="Altium Limited"
R3D: library part Res1, "Resistor", LatestRevisionDate=17-Jul-2002, LatestRevisionNote="Re-released for DXP Platform.", PackageDescription="Axial Device, Thru-Hole; 2 Leads; 0.3 in Pin Spacing", PackageReference=AXIAL-0.3, Published=8-Jun-2000, Publisher="Altium Limited"
R6A R6B RC4: library part CMP-2000-05583-2, "TRIMMER 500K OHM 0.5W PC PIN TOP", Manufacturer=Bourns, Manufacturer Part Number=3296W-1-504LF, Package=3296W, Power Rating=0.5W, Resistance=500kΩ, Temperature="-55°C to +125°C", Temperature Coefficient=100ppm/°C, Temperature Range High=+125°C, Temperature Range Low=-55°C, Tolerance=10%, Voltage Rating=300V, Automotive=No, Category=Res, ComponentLink2Description=Datasheet, ComponentLink2URL=https://www.bourns.com/docs/Product-Datasheets/3296.pdf, Device Class L1="Passive Components", Device Class L2=Resistors, Device Class L3="Variable Resistors and Potentiometers", Digikey Description="TRIMMER 500K OHM 0.5W PC PIN TOP", Height=12.05mm, Lead Free=Yes, Mouser Description="Trimmer; Cermet; Rest 500 Kilohms; PCB; 25 Turns; Pwr-Rtg 0.5W", Octopart=https://octopart.com/3296w-1-504lf-bourns-143884, RoHS=TRUE, Series="Trimpot 3296-Sealed", Standoff Height=0.38mm
R6G R6H R6I R7I R8C: library part CMP-1747-00004-1, "Square Trimpot(R) Trimming Potentiometer, 10 KOhm, 300 V, -55 to 125 degC, 3-Pin THD, RoHS, Tube", Case Code (Imperial)=0612, Case Code (Metric)=1632, Case/Package=1206, Max Operating Temperature=125degC, Min Operating Temperature=-25degC, Package Quantity=5000, Power Rating="1 W", Resistance="50 mohm", Tolerance=1%, Voltage Rating="220 mV", ComponentLink1Description="Manufacturer URL", ComponentLink1URL=http://www.bourns.com/, ComponentLink2Description=Datasheet, ComponentLink2URL=http://www.bourns.com/docs/Product-Datasheets/3362.pdf, DatasheetVersion=May-16, Height="0.6 mm", Length="3.2 mm", Mount="Surface Mount", PackageDescription="3-Pin Through Hole Device, Body 6.6 x 6.99 mm, Pitch 2.54 mm", PackageReference=3326P, Packaging="Tape and Reel", Pins=2, REACH SVHC="No SVHC", RoHSCompliant=True, Width="1.6 mm"
U1: library part CMP-0384-02093-2, "Double Channel Low Noise Operational Amplifier, 1.05 GHz BW, 870 V/us SR, Industrial, 16-pin QFN (CP-16-4), Reel", Amplifiers Per Package=2, Generic Part Number=ADA4817-2, Input Bias Current=2pA, Input Offset Voltage=2mV, Manufacturer="Analog Devices", Code_JEDEC=MO-220-VGGC, ComponentLink1Description="Manufacturer URL", ComponentLink1URL=http://www.analog.com/en/index.html, ComponentLink2Description=Datasheet, ComponentLink2URL=http://www.analog.com/static/imported-files/data_sheets/ADA4817-1_4817-2.pdf, ComponentLink3Description="Package Specification", ComponentLink3URL=http://www.analog.com/static/imported-files/packages/46009454504174339653421710019CP_16_4.pdf, ComponentLink4Description="Reference Circuit", ComponentLink4URL=http://www.analog.com/en/all-operational-amplifiers-op-amps/operational-amplifiers-op-amps/ada4817-2/products/product.html#product-recommendations, DatasheetVersion="Rev. A", Iq/Amp=21mA, Mounting Technology="Surface Mount", PackageDescription="16-Pin Lead Frame Chip Scale Package, Body 4 x 4 mm, Pitch 0.65 mm", PackageReference=CP-16-4, PackageVersion=010606-0, PartNumber=ADA4817-2ACPZ-RL, RevisionNote="Reference Circuit URL fixed", Slew Rate=870V/us, Small Signal Bandwidth=1.05GHz, V Span Max=10V, V Span Min=5V
U1A: library part CMP-00370-134324849-1, "TLV76150DCYR 1-A 16-V high-PSRR linear voltage regulator 4-SOT-223 -40 to 125", Case/Package=SOT-223, Dropout Voltage=900mV, Manufacturer Lifecycle Status=ACTIVE, Max Junction Temperature (Tj)=125°C, Max Supply Voltage=16V, Min Operating Temperature=-40°C, Min Supply Voltage=6.5V, Nominal Supply Current=65µA, Output Current=1A, Output Voltage=5V, Accuracy=1%, Height=1.8mm, Length=6.5mm, Lifecycle Status=Production, Max Operating Temperature=125°C, NexarPartId=134324849, Number of Channels=1, Number of Outputs=1, Number of Pins=4, Thickness=1.6mm, Width=3.5mm
U1B: library part CMP-0065-00037-3, "Switched Capacitor Voltage Converter, 8-pin Narrow SOIC, Pb-Free", Manufacturer="Texas Instruments", PackageTopMarking=NSZXTT*LM26*63M, PowerWise=N, Code_IPC=SOIC127P600-8, Code_JEDEC=MS-012-AA, ComponentLink1Description="Datasheet URL", ComponentLink1URL=http://www.ti.com/general/docs/lit/getliterature.tsp?genericPartNumber=LM2663&fileType=pdf, CompType="Switch Caps", PackageDescription="SOIC Narrow, 4.9 x 3.9 x 1.45mm, 8 Lead, 1.27mm Pitch", PackageReference=D0008A, PinCount=8, RoHS=Y
U1C: library part CMP-09116-000032-1, "IC OPAMP VGA 1 CIRCUIT 16LFCSP", Manufacturer="Analog Devices", Max Junction Temp=+150°C, Max Supply Voltage=5V, Min Supply Voltage=3V, Nominal Supply Current=3-6mA, Output Current per Channel=5mA, Package=CP-16-22, Temperature="-40°C to +85°C", Temperature Range High=+85°C, Temperature Range Low=-40°C, Voltage Gain=80dB, Automotive=No, Bandwidth=18MHz, Category=IC, ComponentLink2Description=Datasheet, ComponentLink2URL=https://www.analog.com/media/en/technical-documentation/data-sheets/AD8338.pdf, Device Class L1="Integrated Circuits (ICs)", Device Class L2="Linear ICs", Device Class L3="Amplifiers - Op Amps", Digikey Description="IC OPAMP VGA 1 CIRCUIT 16LFCSP", Height=0.8mm, Ipc Land Pattern Name=QFN50P300X300X75-16, Lead Free=Yes, Manufacturer Part Number=AD8338ACPZ-R7, Mouser Description="Special Purpose Amplifiers Ultra Low Pwr 18MHz SGL CH VGA", Number of Channels=1, Octopart=https://octopart.com/ad8338acpz-r7-analog+devices-21054770, RoHS=TRUE
U1I: library part CMP-09114-000114-1, "IC OPAMP DIFF 1 CIRCUIT 8SOIC", Case/Package=SOIC, Input Bias Current=7.5uA, Input Offset Voltage (Vos)=500uV, Input Resistance=1.5MR, Max Dual Supply Voltage=6V, Max Operating Temperature=125°C, Max Supply Voltage=12V, Min Dual Supply Voltage=2.25V, Min Operating Temperature=-40°C, Min Supply Voltage=4.5V, Operating Supply Current=24.5mA, Output Current per Channel=100mA, Package Quantity=2500, Power Supply Rejection Ratio (PSRR)=92dB, Voltage Gain=0.009dB, -3db Bandwidth=410MHz, Amplifier Type=DIFFERENTIAL, Common Mode Rejection Ratio=75dB, Contact Plating=Tin, Gain Bandwidth Product=410MHz, Lead Free="Contains Lead", Mount="Surface Mount", Number of Channels=1, Number of Circuits=1, Number of Elements=1, Number of Pins=8, Packaging="Tape and Reel", RoHS Compliant=Yes, Series=-, Slew Rate=800V/µs, Weight=0.019048oz
U2 U?: library part CMP-0384-01346-2, "Double Channel Low Power Operational Amplifier, 145 MHz BW, 180 V/us SR, Industrial, 8-pin SOIC (R-8), Reel", Amplifiers Per Package=2, Generic Part Number=AD8066, Input Bias Current=2pA, Input Offset Voltage=400uV, Manufacturer="Analog Devices", Code_JEDEC=MS-012-AA, ComponentLink1Description="Manufacturer URL", ComponentLink1URL=http://www.analog.com/en/index.html, ComponentLink2Description=Datasheet, ComponentLink2URL=http://www.analog.com/static/imported-files/data_sheets/AD8065_8066.pdf, ComponentLink3Description="Package Specification", ComponentLink3URL=http://www.analog.com/static/imported-files/packages/PKG_PDF/SOIC_Narrow%20(R)/R_8.pdf, ComponentLink4Description="Reference Circuit", ComponentLink4URL=http://www.analog.com/en/all-operational-amplifiers-op-amps/operational-amplifiers-op-amps/ad8066/products/product.html#product-recommendations, DatasheetVersion="Rev. J", Iq/Amp=7.4mA, Mounting Technology="Surface Mount", PackageDescription="8-Pin Standard Small Outline Package, Body 3.9 x 4.9 mm, Pitch 1.27 mm", PackageReference=R-8, PackageVersion=060506-A, PartNumber=AD8066ARZ-R7, RevisionNote="Reference Circuit URL fixed", Slew Rate=180V/us, Small Signal Bandwidth=145MHz, V Span Max=24V, V Span Min=5V
U2C: library part CMP-00370-145533195-1, "OPA863ADBVR Single-channel, high-precision, low-power, 105-MHz, 12-V RRIO voltage-feedback amplifier 5-SOT-23 -40 to 125", Ambient Temperature Range High=125°C, Case/Package=SOT-23, Input Bias Current=300nA, Input Offset Voltage (Vos)=10µV, Manufacturer Lifecycle Status=ACTIVE, Max Junction Temperature (Tj)=150°C, Max Supply Voltage=12.6V, Min Operating Temperature=-40°C, Min Supply Voltage=2.7V, Nominal Supply Current=800µA, Output Current per Channel=30mA, Voltage Gain=128dB, Bandwidth=105MHz, Height=1.45mm, Length=2.9mm, Lifecycle Status=Production, Max Operating Temperature=125°C, NexarPartId=145533195, Number of Channels=1, Number of Pins=5, Response Time=70ns, Thickness=1.2mm, Width=1.6mm

## Free pads (board coordinates)
  round 5 hole 2.4: 3(46,4) 3(46,50.6) 3(81,4) 3(81,50.6)
  round 1.905 hole 1: 4(67.31,27.3)

## Via types
v1: diameter 0.6, hole 0.3, Top Layer to Bottom Layer, 157 vias

## Nets (pads, with @x,y where several pads share a name; then routed paths per layer and width w, separated by ;. In a path a pad name is that pad's centre, name@x,y a point inside that pad or via, vN(x,y) a via of type N, cw(c..) or ccw(c..) an arc to the next point about the centre after c; other vN are vias at no path point)
+5V: ADC.1 C1A.1 C1B.1 C1C.1 C1F.1 C1I.1 C2A.1 C2B.1 C2C.1 C2F.1 C2I.1 C3C.1 C4.2 C4C.1 C5G.1 C6G.1 C10.2 J1.1 J3.2 J4.1 R6A.3 R6B.3 R6G.1 R6H.1 R6I.1 R7I.3 RC4.2 RC4.3 U1.6 U1.14 U1A.2 U1A.4 U1B.8 U1C.15 U1I.3 U2.8 U2C.5 | length 309.5
  Top Layer w0.3: J1.1 54.739,36.921 54.915,36.745 J3.2
  Top Layer w0.5: v1(19.105,14.3) 19.931,13.474 v1(28.384,13.474) ; v1(39.463,18.05) v1(43.773,18.05) v1(46.2,18.05) R6H.1 ; R6A.3 53.864,44.16 54.157,44.453 54.157,52.607 54.45,52.9 v1(63.175,52.9) 71.741,52.9 72.034,52.607 72.034,50.023 72.327,49.73 J4.1 ; R6I.1 55.037,5.298 ; v1(55.037,13.458) 55.037,5.298 ; v1(70.693,24.361) 77.96,24.361 ; R6G.1 77.96,24.361 ; 55.037,5.298 55.039,5.3 v1(64.115,5.3) 68.423,5.3 70.763,2.96 R7I.3 77.96,6.401 77.96,24.361
  Bottom Layer w0.25: v1(28.384,13.474) U2C.5 C4C.1 C4C.1@30.25,11.1
  Bottom Layer w0.3: U1C.15 v1(43.773,18.05) ; J3.2 57.279,32.568 57.522,32.325 63.105,32.325 63.555,32.775 63.575,32.775 63.825,33.025 C2A.1 U1.14 ; U1.6 v1(63.175,52.9) ; C2I.1 v1(64.115,5.3) U1I.3 ; U2.8 C5G.1 69.093,24.185 69.269,24.361 v1(70.693,24.361)
  Bottom Layer w0.5: C4.2 U1A.4 ; ADC.1 C2F.1 v1(19.105,14.3) 19.105,36.945 ; U1A.2 U1A.4 ; U1B.8 14.395,38.841 ; 14.397,38.843 14.395,38.841 ; RC4.2@36.923,33.695 39.463,33.695 v1(39.463,18.05) ; RC4.3 39.463,36.938 39.47,36.945 ; R6A.3 J1.1 51.658,36.945 39.47,36.945 ; v1(55.037,13.458) R6H.1@55.037,18.015 ; R6B.3 J4.1 ; U1A.4 C10.2 ; C10.2 14.395,38.841 ; C10.2 19.105,36.945 ; 19.105,36.945 39.47,36.945
+eOP: J2.1 R1I.2 U1.13 | length 43.9
  Top Layer w0.3: J2.1 v1(70.66,35.07)
  Bottom Layer w0.3: R1I.2 56.526,15.137 56.35,15.313 56.35,22.355 56.526,22.531 65.789,22.531 70.66,27.401 J2.1 ; U1.13 64.475,36.394 65.799,35.07 v1(70.66,35.07)
+IP: J2.2 R1G.1 | length 4.3
  Bottom Layer w0.3: J2.2 73.825,30.4 74.001,30.224 R1G.1
+VB: C6A.1 R5A.2 U1.2 | length 7.6
  Bottom Layer w0.3: R5A.2 C6A.1 58.949,43.975 60.249,42.675 U1.2
+VT: J7.2 R2A.2 R3A.2 R7G.1 | length 48.2
  Top Layer w0.3: v1(57.021,38.8) 57.021,22.707 57.197,22.531 v1(75.593,22.531)
  Bottom Layer w0.3: v1(57.021,38.8) 57.021,40.264 57.277,40.52 R3A.2 ; R7G.1@75.601,22.952 75.601,30.464 75.776,30.64 J7.2
-5V: C3A.1 C3B.1 C3G.1 C3I.2 C4A.1 C4B.1 C4G.1 C4I.2 C12.2 C13.2 J6.1 R6A.1 R6B.1 R6G.3 R6H.3 R6I.3 U1.4 U1.12 U1B.5 U1I.6 U2.4 | length 234.1
  Top Layer w0.5: R6A.1 49.197,46.755 49.197,23.306 49.373,23.13 R6H.3 ; v1(52.52,15.137) v1(64.115,15.137) 64.115,16.526 64.291,16.702 v1(73.993,16.702) ; J6.1 82.864,32.249 83.04,32.073 R6G.3 v1(83.04,17.705) v1@83.04,10 ; J6.1@75.344,32.265 R6B.1
  Bottom Layer w0.3: R6A.1 52.117,49.675 60.75,49.675 61.4,49.025 61.475,49.025 61.625,48.875 U1.4 ; C4I.2 v1(64.115,15.137) U1I.6 ; U1.12 C4A.1 65.375,37.125 65.525,36.975 65.6,36.975 66.25,36.325 74.909,36.325 R6B.1 ; v1(73.993,16.702) C3G.1 ; C4G.1 C3G.1 ; v1(83.04,17.705) 76.693,17.705 76.517,17.529 C3G.1
  Bottom Layer w0.5: U1B.5 C13.2 C12.2 48.665,46.223 R6A.1 ; R6I.3 49.957,1.063 50.25,0.77 83.93,0.77 84.223,1.063 84.223,8.817 v1(83.04,10) ; v1(52.52,15.137) 52.52,22.837 52.813,23.13 R6H.3@54.523,23.13
-eOP: J5.1 J9.3 U1.5 | length 108.2
  Bottom Layer w0.3: J9.3 75.959,1.73 76.135,1.906 J5.1@76.135,11.328 ; U1.5 62.525,49.325 62.475,49.375 62.475,53.575 62.651,53.751 84.115,53.751 84.291,53.575 84.291,11.446 84.115,11.27 J5.1
-IP: J5.2 R1H.1 | length 4.2
  Bottom Layer w0.3: R1H.1 J5.2@74.843,11.27 ; J5.2@74.843,11.35 J5.2@74.865,11.328
-VB: C6B.1 R5B.2 U1.10 | length 7.6
  Bottom Layer w0.3: U1.10 66.75,43.325 68.051,42.024 C6B.1 R5B.2
-VT: J8.2 R2B.2 R3B.2 R7H.1 | length 57
  Bottom Layer w0.3: R2B.2@69.984,47.202 69.984,45.76 69.749,45.526 R3B.2 72.693,43.975 72.869,43.799 72.869,40.742 73.045,40.566 80.781,40.566 80.957,40.39 80.957,25.126 83.737,22.346 83.737,13.576 83.562,13.4 J8.2 R7H.1
ADC_IN: ADC.3 J10.1 | length 24.6
  Bottom Layer w0.3: ADC.3 6.475,9.759 24.558,9.759 24.733,9.934 J10.1
AGC_N: DIFF.1 R5C.2 U1C.10 | length 7.9
  Bottom Layer w0.3: R5C.2 35.983,14.348 36.159,14.524 37.535,14.524 37.99,14.524 39,13.514 DIFF.1 40.02,14.524 U1C.10
AGC_P: DIFF.2 R4C.2 U1C.11 | length 7.9
  Bottom Layer w0.3: R4C.2 35.983,15.2 36.159,15.024 37.742,15.024 37.99,15.024 39,16.034 DIFF.2 40.02,15.024 U1C.11
BPF_N: C1D.2 C3D.2 R3D.1 U1C.4 | length 11.4
  Bottom Layer w0.3: U1C.4 49.739,14.024 50.637,13.126 R3D.1 C1D.2
BPF_P: C2D.2 C3D.1 R4D.2 U1C.1 | length 13.9
  Top Layer w0.3: v1(48.239,15.524) 50.637,13.126 v1(50.637,9.5)
  Bottom Layer w0.3: U1C.1 v1(48.239,15.524) ; v1(50.637,9.5) C2D.2
CS_PD: ADC.6 P9.37 | length 11.1
  Bottom Layer w0.3: ADC.6 4.505,6.462 5.135,5.832 5.135,3.81 5.903,3.041 10.215,3.041 P9.37
GAIN_OUT: J10.3 J11.2 R6C.1 U2C.1 | length 23.3
  Bottom Layer w0.3: U2C.1 J10.3 27.273,9.935 27.449,9.759 R6C.1 34.383,8.158 J11.2
GND: 5V.1 ADC.2 C1.2 C1A.2 C1B.2 C1C.2 C1E.2 C1F.2 C1G.1 C1H.1 C1I.2 C2.2 C2A.2 C2B.2 C2C.2 C2F.2 C2I.2 C3.1 C3A.2 C3B.2 C3C.2 C3G.2 C3I.1 C4.1 C4A.2 C4B.2 C4C.2 C4G.2 C4I.1 C5A.2 C5B.2 C5C.1 C5G.2 C5I.2 C6A.2 C6B.2 C6C.1 C6G.2 C7B.2 C10.1 C12.1 C13.1 GND.1 J0.2 J0.3 J1.3 J4.3 J7.1 J8.1 J11.1 P9.23 P9.24 P9.25 P9.26 R2C.2 R4G.1 R4H.1 R5D.1 R7C.1 R7I.1 R8C.1 U1A.1 U1B.1 U1B.3 U1B.6 U1C.5 U1C.17 U1I.9 U2C.2
  other v1: 51.62,2.258 53.02,2.258 54.42,2.258 68.4,2.944 65.715,4.373 62.845,6.347 2,6.829 2,7.829 45.996,8.068 79.275,8.197 80.675,8.197 82.075,8.197 57.605,8.27 2,8.829 9.823,8.865 11.223,8.865 12.623,8.865 14.023,8.865 15.423,8.865 16.823,8.865 18.223,8.865 19.623,8.865 21.023,8.865 22.475,8.865 23.875,8.864 25.275,8.864 26.675,8.864 28.075,8.864 29.528,8.864 30.928,8.864 32.328,8.864 2,9.829 69.823,9.892 71.223,9.892 72.623,9.892 64.75,10.45 8.433,10.653 9.833,10.653 11.233,10.653 12.633,10.653 14.033,10.653 15.433,10.653 16.833,10.653 18.233,10.653 19.633,10.653 21.033,10.653 22.486,10.653 23.886,10.653 25.975,10.653 28.086,10.653 72.623,12.21 41.05,13.021 45.996,13.021 52.52,13.458 57.605,13.458 61.955,13.919 43.523,14.774 74.622,15 79.275,15.841 80.675,15.841 82.075,15.841 57.605,16.462 41.05,16.527 45.996,16.527 30.13,18.538 31.583,18.538 32.983,18.538 55.037,20.09 55.037,21.09 59.7,21.419 47.616,21.545 71.543,21.607 36.923,21.684 47.616,22.945 36.923,23.137 59.7,23.6 47.616,24.398 36.923,24.59 47.617,25.798 36.923,25.99 74.9,26.19 71.451,27.105 47.617,27.198 51.682,27.364 77.978,27.939 79.378,27.939 51.682,28.364 51.682,29.364 51.682,30.364 23.778,32.121 25.178,32.121 26.578,32.121 28.031,32.121 66.7,33 2,33.915 62.225,34.05 55.934,34.127 2,34.915 72,35.07 79.385,35.104 2,35.915 79.385,36.504 2,36.915 72,37.6 79.385,37.904 66.7,38.25 55.232,38.8 79.385,39.304 55.232,39.8 55.232,40.8 71.349,40.8 66.7,41.127 55.232,41.8 82.504,42.422 32.914,43.382 34.314,43.382 35.714,43.382 37.114,43.382 82.505,43.822 60.025,44.7 82.505,45.222 73.619,45.287 60.025,45.7 82.505,46.622 73.619,46.687 73.619,48.087 64.775,51.94 66.3,51.94
LNA_N: R1D.2 R4I.1 U1I.5 | length 5.2
  Bottom Layer w0.3: R4I.1 R1D.2 62.669,11.4 62.845,11.576 U1I.5
LNA_P: R2D.2 R3I.1 U1I.4 | length 5.9
  Bottom Layer w0.3: R3I.1 60.805,6.902 R2D.2 ; R2D.2 62.669,9.499 62.845,9.324 U1I.4
LPF_IN: J10.4 R1E.2 | length 2.3
  Bottom Layer w0.25: J10.4 27.273,20.89 R1E.2
LPF_OUT: C1E.1 J10.2 R1E.1 | length 6.5
  Bottom Layer w0.3: J10.2 C1E.1 R1E.1
MISO_PD: ADC.5 P9.40 | length 8.8
  Bottom Layer w0.3: ADC.5 5.455,8.453 5.631,8.629 8.769,8.629 8.945,8.453 P9.40
MODE: R7C.2 U1C.6 | length 2
  Bottom Layer w0.3: R7C.2 U1C.6
MOSI_PD: ADC.4 P9.42 | length 3.1
  Bottom Layer w0.3: P9.42 ADC.4
NetC1D_1: C1D.1 R1D.1 | length 3.4
  Bottom Layer w0.3: C1D.1 R1D.1
NetC1G_2: C1G.2 R1G.2 R2G.2 U2.3 | length 11.5
  Bottom Layer w0.3: R1G.2@72.393,28.028 72.401,28.02 R2G.2 72.401,18.205 72.633,17.972 U2.3
NetC1H_2: C1H.2 R1H.2 R2H.2 U2.5 | length 5.4
  Bottom Layer w0.3: R1H.2 C1H.2 R2H.2 U2.5
NetC2D_1: C2D.1 R2D.1 | length 3.4
  Bottom Layer w0.3: C2D.1 R2D.1
NetC2G_1: C2G.1 R3G.1 R4G.2 R5G.1 U2.2 | length 8.6
  Bottom Layer w0.3: U2.2 R4G.2
NetC2G_2: C2G.2 R2G.1 R3G.2 R7G.2 U2.1 | length 9
  Bottom Layer w0.3: R2G.1 73.993,24.353 R7G.2 U2.1 75.91,20.512 76.24,20.842 C2G.2
NetC2H_1: C2H.1 R3H.1 R4H.2 R5H.1 U2.6 | length 7.8
  Bottom Layer w0.3: R5H.1 U2.6
NetC2H_2: C2H.2 R2H.1 R3H.2 R7H.2 U2.7 | length 12.1
  Bottom Layer w0.3: C2H.2 R3H.2@66.612,19.572 ; R3H.2@66.616,19.568 67.817,19.568 68.144,19.242 U2.7 69.104,19.231 70.514,19.231 70.693,19.052 R2H.1 R7H.2
NetC5A_1: C5A.1 J1.2 U1.15 | length 17.1
  Bottom Layer w0.3: J1.2 52.927,35.651 53.577,35 C5A.1 ; C5A.1@58.952,35 59.202,35.25 59.202,35.325 59.652,35.775 62.399,35.775 63.3,36.676 63.3,39.324 63.175,39.449 U1.15
NetC5B_1: C5B.1 J4.2 U1.7 | length 16.9
  Bottom Layer w0.3: U1.7 63.825,46.551 63.7,46.676 63.7,49.324 64.601,50.225 67.374,50.225 67.824,50.675 67.824,50.75 68.074,51 C5B.1 J4.2
NetC5C_2: C5C.2 R2C.1 R3C.2 RC4.1 | length 17.4
  Bottom Layer w0.3: C5C.2 R3C.2 ; RC4.1@34.383,33.695 R3C.2 ; R2C.1 R3C.2
NetC5I_1: C5I.1 R8I.1 U1I.2 | length 6.7
  Top Layer w0.3: v1(65.385,6.5) v1(68.4,6.5)
  Bottom Layer w0.3: v1(65.385,6.5) U1I.2 ; v1(68.4,6.5) C5I.1
NetC6C_2: C6C.2 U1C.7 U1C.8 | length 4.3
  Bottom Layer w0.3: C6C.2 U1C.8 U1C.7
NetC7B_1: C7B.1 CfB.1 R3B.1 R4B.1 RfTB.1 U1.9 | length 19.8
  Top Layer w0.3: v1(68.149,33.8) v1(68.149,43.975)
  Bottom Layer w0.3: U1.9 v1(68.149,43.975) CfB.1@68.149,47.202 ; RfTB.1 CfB.1 ; v1(68.149,33.8) C7B.1
NetC11_1: C11.1 U1B.2 | length 4.6
  Bottom Layer w0.5: C11.1 U1B.2
NetC11_2: C11.2 U1B.4 | length 6.3
  Bottom Layer w0.5: C11.2 8.652,46.223 8.945,45.93 U1B.4
NetCfA_1: CfA.1 R3A.1 R4A.2 RfTA.1 U1.1 | length 15.3
  Top Layer w0.3: v1(60.7,31.3) v1(60.7,38.8)
  Bottom Layer w0.3: v1(60.7,38.8) CfA.1 R3A.1 U1.1@61.625,42.024
NetCfA_2: CfA.2 R1A.1 R2A.1 RfTA.2 | length 5.5
  Bottom Layer w0.3: R2A.1 CfA.2 RfTA.2 R1A.1
NetCfB_2: CfB.2 R1B.1 R2B.1 RfTB.2 | length 5.5
  Bottom Layer w0.3: R1B.1@64.475,48.802 66.282,48.802 CfB.2@68.149,48.802 ; CfB.2 R2B.1
NetJ3_1: J3.1 PD.1 R4A.1 | length 11.2
  Bottom Layer w0.3: J3.1 J3.1 56.433,31.3 R4A.1 59.1,27.476 59.276,27.3 PD.1
NetJ6_2: J6.2 pad.4 PD.2 R4B.2 | length 13.7
  Bottom Layer w0.3: PD.2 pad.4 67.31,27.357 68.149,28.196 R4B.2 74.009,32.2 J6.2
NetJ9_1: J9.1 R5I.1 | length 3.1
  Bottom Layer w0.3: J9.1@58.469,3.945 R5I.1@58.469,7.054
NetJ9_2: J9.2 R2I.2 | length 2.3
  Bottom Layer w0.3: J9.2 60.757,3 R2I.2
NetR1A_2: R1A.2 U1.16 | length 2.3
  Bottom Layer w0.3: R1A.2 U1.16
NetR1B_2: R1B.2 U1.8 | length 2.3
  Bottom Layer w0.3: U1.8 R1B.2@64.475,47.202
NetR1I_1: R1I.1 R4I.2 U1I.8 | length 14.6
  Bottom Layer w0.3: R4I.2 R1I.1 59.205,16.526 59.381,16.702 66.479,16.702 66.655,16.526 U1I.8
NetR2I_1: R2I.1 R3I.2 U1I.1 | length 14.3
  Bottom Layer w0.3: R3I.2 62.194,5.3 62.37,5.124 R2I.1 62.62,2.762 62.62,2.687 63.124,2.182 66.479,2.182 66.655,2.358 U1I.1
NetR3C_1: R3C.1 R4C.1 U2C.3 | length 4.7
  Bottom Layer w0.3: U2C.3 32.18,16.044 R4C.1 R3C.1
NetR3D_2: R3D.2 R4D.1 R5D.2 | length 3.7
  Bottom Layer w0.3: R5D.2 R3D.2 R4D.1
NetR5A_1: R5A.1 R6A.2 | length 4
  Bottom Layer w0.3: R6A.2 R5A.1
NetR5B_1: R5B.1 R6B.2 | length 4
  Bottom Layer w0.3: R5B.1 R6B.2
NetR5C_1: R5C.1 R6C.2 U2C.4 | length 4.6
  Bottom Layer w0.3: U2C.4 32.18,13.504 34.383,13.504 R6C.2@34.383,11.1
NetR5G_2: R5G.2 R6G.2 | length 2.2
  Bottom Layer w0.3: R6G.2 80.514,22.869 80.514,21.844 80.82,21.539 R5G.2
NetR5H_2: R5H.2 R6H.2 | length 4.6
  Bottom Layer w0.3: R6H.2 57.612,18.148 57.788,17.972 R5H.2
NetR5I_2: R5I.2 R6I.2 | length 4.4
  Bottom Layer w0.3: R6I.2@52.52,7.075 56.854,7.075 R5I.2
NetR7I_2: R7I.2 R8I.2 | length 2.4
  Bottom Layer w0.3: R8I.2 70.979,6.5 R7I.2
OFSN: C7C.1 U1C.14 | length 3
  Bottom Layer w0.3: C7C.1 42.973,17.345 43.273,17.045 U1C.14
PS_ON: P9.44
VAGC: R8C.2 U1C.13 | length 8.2
  Bottom Layer w0.3: R8C.2@42.033,24.148 42.033,17.648 42.773,16.908 U1C.13
VCC: 5V.2 C1.1 C2.1 C3.2 J0.1 U1A.3 | length 23.9
  Bottom Layer w0.5: C3.2 U1A.3 6.645,26.107 C2.1 5V.2 J0.1
VREF: C7C.2 R8C.3 U1C.16 | length 5.5
  Bottom Layer w0.3: U1C.16 44.273,17.045 44.573,17.345 C7C.2 R8C.3@44.573,21.608
pads on no net: P8.23 P8.24 P8.25 P8.26 P8.27 P8.28 P8.29 P8.30 P8.31 P8.32 P8.33 P8.34 P8.35 P8.36 P8.37 P8.38 P8.39 P8.40 P8.41 P8.42 P8.43 P8.44 P8.45 P8.46 P9.27 P9.28 P9.29 P9.30 P9.31 P9.32 P9.33 P9.34 P9.35 P9.36 P9.38 P9.39 P9.41 P9.43 P9.45 P9.46 U1.3 U1.11 U1.17 U1B.7 U1C.2 U1C.3 U1C.9 U1C.12 U1I.7 U?.1 U?.2 U?.3 U?.4 U?.5 U?.6 U?.7 U?.8
copper on no net:
  other v1: 62.85,42.35 64.15,42.35 62.85,43.65 64.15,43.65

## Polygon pours and split planes (outlines as drawn)
GND on Bottom Layer "GND_L02_P013" (solid, pour order 13): 0.5,0.5 0.5,54.1 84.5,54.1 84.5,0.5
GND on Top Layer "GND_L01_P014" (solid, pour order 14): 0.5,0.5 0.5,54.1 84.5,54.1 84.5,0.5

## Other copper
Multi-Layer:
  pour cut-out: 51.687,12.025 48.387,12.025 48.387,16.019 51.687,16.019
  pour cut-out: 58.55,26.197 58.55,32.05 60.075,32.05 60.075,26.197
  pour cut-out: 60.075,30.675 60.075,38.25 61.325,38.25 61.325,30.675
  pour cut-out: 62.132,38.25 62.132,41.632 62.936,41.632 62.936,38.25
  pour cut-out: 58.327,38.25 58.327,42.436 62.132,42.436 62.132,38.25
  pour cut-out: 64.064,44.368 64.064,47.75 64.868,47.75 64.868,44.368
  pour cut-out: 64.868,43.564 64.868,47.75 68.699,47.75 68.699,43.564
  pour cut-out: 67.599,26.197 67.599,44.6 68.699,44.6 68.699,26.197
  pour cut-out: 48.387,16.019 48.387,13.529 44.426,13.529 44.426,16.019
  pour cut-out: 61.355,8.875 48.387,8.875 48.387,12.025 61.355,12.025
  pour cut-out: 58.55,26.197 58.55,28.402 68.699,28.402 68.699,26.197

## Silkscreen, mask and mechanical layers (free items; w line width, h text height)
Top Overlay:
  circle w0.254: c64.77,27.3 r4.6
  lines w0.15: 61.128,25.547 61.128,29.053
  text "OpenVLC_RX_2.7" at 29.61,41.123 h0.8
  text "IMDEA Networks" at 29.61,39.691 h0.8
  text "K" at 61.932,21.982 h0.8
  text "A" at 67.063,21.982 h0.8
  text "LPF_OUT" at 22.502,20.412 h0.5
  text "LPF_IN" at 26.247,20.412 h0.5
  text "+5V" at 17.073,14.05 h0.5
  text "ADC_IN" at 22.715,13.897 h0.5
  text "GAIN_OUT" at 25.954,13.897 h0.5
  text "GND" at 30.634,4.953 h0.5 r270
Bottom Overlay:
  text "+VB" at 51,52.072 h0.5
  text "OFF" at 77,51.1 h0.5 r270
  text "ON" at 77,49.897 h0.5 r270
  text "LNA2" at 76.279,48.165 h0.5
  text "-5V" at 21.695,47.187 h0.5
  text "-VB" at 76,44.569 h0.5
  text "ON" at 49.5,35.95 h0.5 r270
  text "OFF" at 49.5,34.25 h0.5 r270
  text "+5V" at 20.998,33.937 h0.5
  text "LNA1" at 52.57,32.846 h0.5
  text "OPEN" at 79.67,32.184 h0.5
  text "ALC" at 71.961,31.952 h0.5
  text "DC_OFFSET" at 42.272,31.538 h0.5 r270
  text "OPEN" at 52.835,31.009 h0.5 r270
  text "OPEN" at 75.624,30.206 h0.5
  text "GND" at 12.263,28 h0.5 r270